# Altium PCB PCB0008.PcbDoc (part 2 of 2)
Units mil, origin at the board's own origin, x right, y up, seen from the top; angles counter-clockwise.
Board outline 5500 x 5500 mil, 4 copper layers (Top Layer, Ground, Power, Bottom Layer); 231 components, 118 nets, 798 pads, 388 vias.
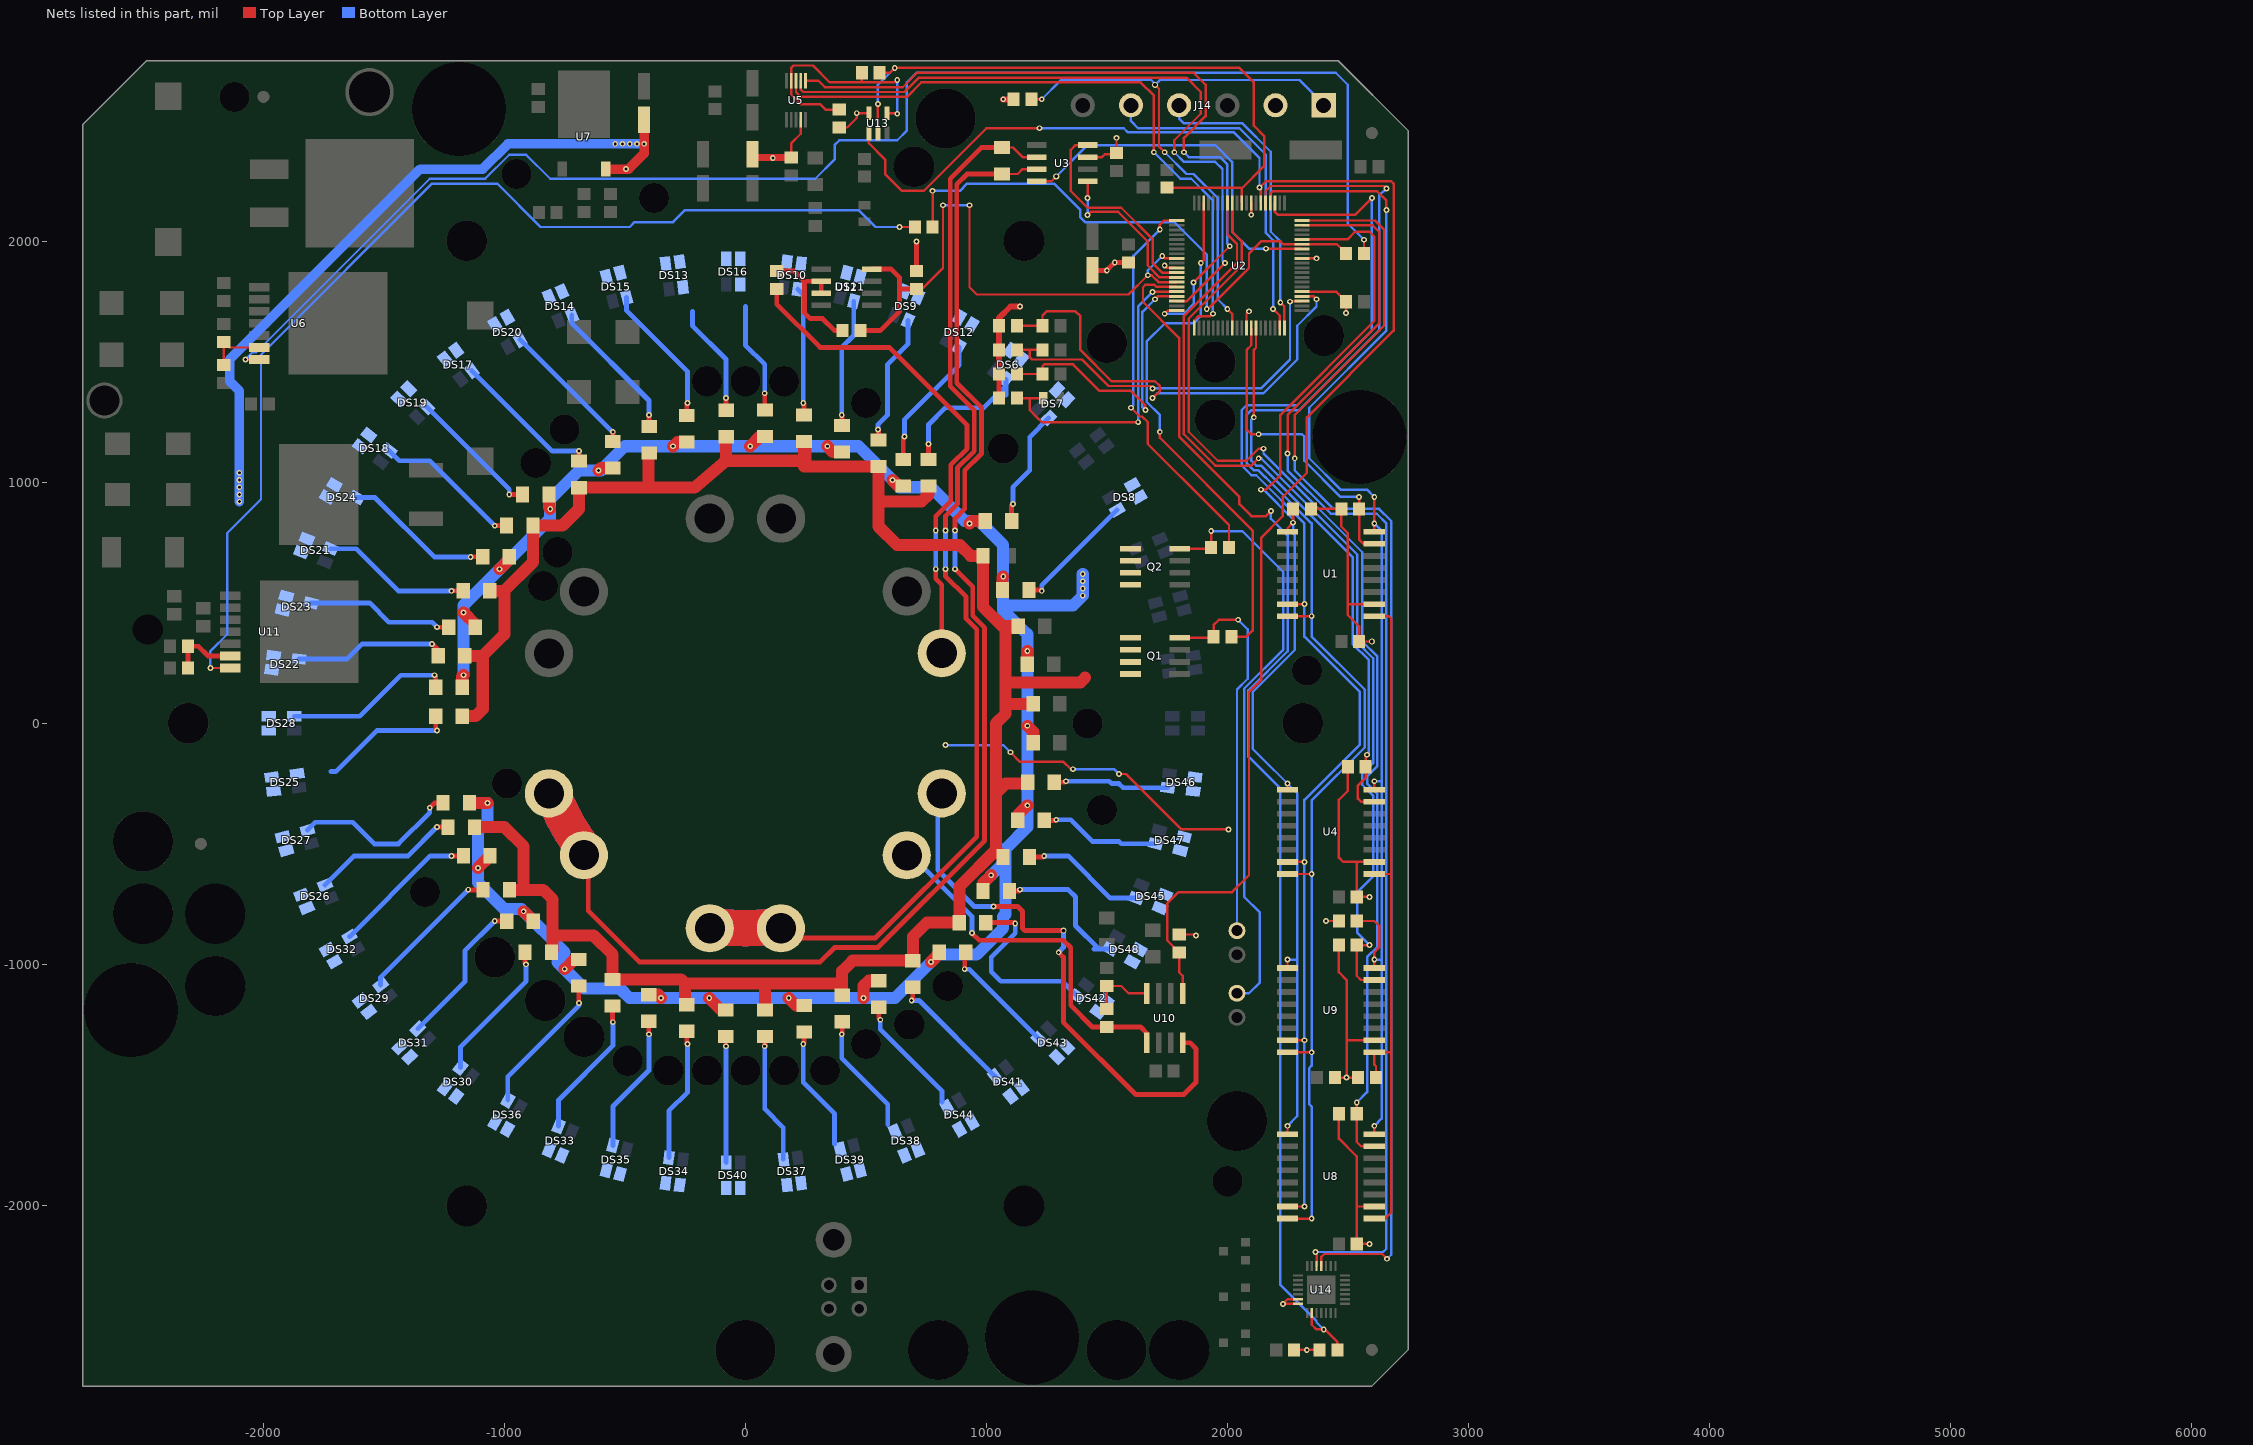
[diagram p4: the nets of this part, all layers, seen from the top]

## Via types
v1: diameter 24, hole 12, Top Layer to Bottom Layer, tented both sides, 316 vias
v2: diameter 25, hole 15, Top Layer to Bottom Layer, tented both sides, 67 vias
v3: diameter 40, hole 24, Top Layer to Bottom Layer, tented both sides, 5 vias

## Nets (pads, with @x,y where several pads share a name; then routed paths per layer and width w, separated by ;. In a path a pad name is that pad's centre, name@x,y a point inside that pad or via, vN(x,y) a via of type N, cw(c..) or ccw(c..) an arc to the next point about the centre after c; other vN are vias at no path point) (continued)
NetDS6_1: DS6.1 DS6.3 DS6.4 R49.2 | length 600
  Top Layer w20: R49.2@760,1095 v1(760,1160)
  Bottom Layer w20: v1(760,1160) 760,1240 830,1310 990,1310 DS6.3@1082.07,1402.07 ; 1082.07,1362.07 DS6.3@1082.07,1427.86
NetDS7_1: DS7.1 DS7.3 DS7.4 R60.2 | length 491.4
  Top Layer w20: R60.2@1105,840 1105,905 v1(1110,910)
  Bottom Layer w20: v1(1110,910) 1110,980 1180,1050 1180,1188.24 DS7.3@1259.3,1267.54
NetDS8_1: DS8.1 DS8.3 DS8.4 R61.2 | length 519.4
  Top Layer w20: R61.2@1177.42,553.51 1226.49,553.51 v1(1230,550)
  Bottom Layer w20: v1(1230,550) 1230,573.12 DS8.3@1542.73,885.85
NetDS9_1: DS9.1 DS9.3 DS9.4 R50.2 | length 548.8
  Top Layer w20: v1(550,1220) 552.66,1217.34 R50.2@552.66,1175.69
  Bottom Layer w20: v1(550,1220) 550,1240 590,1280 590,1490 674.94,1574.94 DS9.3@674.94,1671.6
NetDS10_1: DS10.1 DS10.3 DS10.4 R51.2 | length 534
  Top Layer w20: v1(240,1330) 243.53,1326.47 R51.2@243.53,1279.3
  Bottom Layer w20: DS10.3@217.34,1802.45 240,1779.79 v1(240,1330)
NetDS11_1: DS11.1 DS11.3 DS11.4 R62.2 | length 536.6
  Top Layer w20: v1(400,1280) 401.06,1278.94 R62.2@401.06,1236.48
  Bottom Layer w20: v1(400,1280) 400,1560 449.77,1609.77 DS11.3@449.77,1752.02
NetDS12_1: DS12.1 DS12.3 DS12.4 R63.2 | length 564.5
  Top Layer w20: R63.2@654.82,1094.88 654.82,1184.82 v1(660,1190)
  Bottom Layer w20: v1(660,1190) 660,1260 887,1487 DS12.3@887,1563.21
NetDS13_1: DS13.1 DS13.3 DS13.4 R52.2 | length 468
  Top Layer w20: R52.2@-80,1300 v1(-80,1350)
  Bottom Layer w20: -220,1710 -220,1650 -80,1510 v1(-80,1350)
NetDS14_1: DS14.1 DS14.3 DS14.4 R53.2 | length 594.7
  Top Layer w20: v1(-400,1280) -399.65,1279.65 R53.2@-399.65,1232.34
  Bottom Layer w20: DS14.3@-720.38,1694.2 -720.38,1660.38 -400,1340 v1(-400,1280)
NetDS15_1: DS15.1 DS15.3 DS15.4 R64.2 | length 595.9
  Top Layer w20: R64.2@-243.14,1277.36 -243.14,1326.86 v1(-240,1330)
  Bottom Layer w20: DS15.3@-492.72,1767.3 -492.72,1712.72 -240,1460 v1(-240,1330)
NetDS16_1: DS16.1 DS16.3 DS16.4 R65.2 | length 461.1
  Top Layer w20: R65.2@80,1302.08 v1(80,1370)
  Bottom Layer w20: 0,1730 0,1570 80,1490 v1(80,1370)
NetDS17_1: DS17.1 DS17.3 DS17.4 R54.2 | length 625.3
  Top Layer w20: R54.2@-690.49,1088.39 -690.49,1129.51 v1(-690,1130)
  Bottom Layer w20: DS17.3@-1135.22,1463.81 -801.41,1130 v1(-690,1130)
NetDS18_1: DS18.1 DS18.3 DS18.4 R55.2 | length 616.4
  Top Layer w20: v1(-1040,820) -1038.98,821.02 R55.2@-991.19,821.02
  Bottom Layer w20: DS18.3@-1477.86,1132.07 -1435.79,1090 -1310,1090 v1(-1040,820)
NetDS19_1: DS19.1 DS19.3 DS19.4 R66.2 | length 559.8
  Top Layer w20: v1(-980,950) R66.2@-925,950
  Bottom Layer w20: DS19.3@-1321.54,1313.3 -980,971.76 v1(-980,950)
NetDS20_1: DS20.1 DS20.3 DS20.4 R67.2 | length 583.2
  Top Layer w20: v1(-550,1210) -549.94,1209.94 R67.2@-549.94,1170.17
  Bottom Layer w20: DS20.3@-934.85,1592.73 -552.12,1210 v1(-550,1210)
NetDS21_1: DS21.1 DS21.3 DS21.4 R56.2 | length 623.3
  Top Layer w20: v1(-1220,550) -1219.74,550.26 R56.2@-1170.83,550.26
  Bottom Layer w20: DS21.3@-1721.6,724.94 -1614.94,724.94 -1440,550 v1(-1220,550)
NetDS22_1: DS22.1 DS22.3 DS22.4 R57.2 | length 638.8
  Top Layer w20: v1(-1300,330) -1275,305 R57.2@-1275,280
  Bottom Layer w20: DS22.3@-1852.45,267.34 -1652.66,267.34 -1590,330 v1(-1300,330)
NetDS23_1: DS23.1 DS23.3 DS23.4 R68.2 | length 612.5
  Top Layer w20: v1(-1279.24,399.24) R68.2@-1231.14,399.24
  Bottom Layer w20: DS23.3@-1802.02,499.77 -1559.77,499.77 -1480,420 -1300,420 v1(-1279.24,399.24)
NetDS24_1: DS24.1 DS24.3 DS24.4 R69.2 | length 626.5
  Top Layer w20: v1(-1140,690) -1138.7,691.3 R69.2@-1089.61,691.3
  Bottom Layer w20: DS24.3@-1613.21,937 -1537,937 -1290,690 v1(-1140,690)
NetDS25_1: DS25.1 DS25.3 DS25.4 R88.2 | length 572.5
  Top Layer w20: R88.2@-1285,30 -1285,-25 v1(-1280,-30)
  Bottom Layer w20: -1720,-200 -1700,-200 -1530,-30 v1(-1280,-30)
NetDS26_1: DS26.1 DS26.3 DS26.4 R89.2 | length 609.5
  Top Layer w20: v1(-1280,-430) -1279.63,-430.37 R89.2@-1234.45,-430.37
  Bottom Layer w20: DS26.3@-1744.2,-670.38 -1623.82,-550 -1400,-550 v1(-1280,-430)
NetDS27_1: DS27.1 DS27.3 DS27.4 R100.2 | length 695.3
  Top Layer w20: v1(-1310,-350) -1290,-330 R100.2@-1255,-330
  Bottom Layer w20: DS27.3@-1817.3,-442.72 -1784.58,-410 -1630,-410 -1540,-500 -1440,-500 -1310,-370 v1(-1310,-350)
NetDS28_1: DS28.1 DS28.3 DS28.4 R101.2 | length 704.5
  Top Layer w20: v1(-1290,200) -1285,195 R101.2@-1285,150
  Bottom Layer w20: DS28.3@-1871.85,29.53 -1600.47,29.53 -1430,200 v1(-1290,200)
NetDS29_1: DS29.1 DS29.3 DS29.4 R90.2 | length 607.3
  Top Layer w20: v1(-1150,-690) -1149.12,-690.88 R90.2@-1088.98,-690.88
  Bottom Layer w20: DS29.3@-1513.81,-1085.22 -1513.81,-1053.81 v1(-1150,-690)
NetDS30_1: DS30.1 DS30.3 DS30.4 R91.2 | length 592.6
  Top Layer w20: R91.2@-915,-950 -915,-995 v1(-910,-1000)
  Bottom Layer w20: DS30.3@-1182.07,-1427.86 -1182.07,-1342.07 -910,-1070 v1(-910,-1000)
NetDS31_1: DS31.1 DS31.3 DS31.4 R102.2 | length 629.3
  Top Layer w20: v1(-1040,-820) -1039.34,-820.66 R102.2@-990.78,-820.66
  Bottom Layer w20: DS31.3@-1359.3,-1267.54 -1163.87,-1072.11 -1163.87,-943.87 v1(-1040,-820)
NetDS32_1: DS32.1 DS32.3 DS32.4 R103.2 | length 611.5
  Top Layer w20: v1(-1220,-550) -1219.86,-549.86 R103.2@-1170,-549.86
  Bottom Layer w20: DS32.3@-1642.73,-884.85 -1307.88,-550 v1(-1220,-550)
NetDS33_1: DS33.1 DS33.3 DS33.4 R92.2 | length 592.4
  Top Layer w20: R92.2@-551.29,-1172.9 -551.29,-1238.71 v1(-550,-1240)
  Bottom Layer w20: DS33.3@-774.94,-1671.6 -774.94,-1562.96 -550,-1338.02 v1(-550,-1240)
NetDS34_1: DS34.1 DS34.3 DS34.4 R93.2 | length 558.1
  Top Layer w20: R93.2@-243.22,-1277.75 -243.22,-1326.78 v1(-240,-1330)
  Bottom Layer w20: DS34.3@-317.34,-1802.45 -317.34,-1607.34 -240,-1530 v1(-240,-1330)
NetDS35_1: DS35.1 DS35.3 DS35.4 R104.2 | length 578.6
  Top Layer w20: R104.2@-400.81,-1235.74 -400.81,-1289.19 v1(-400,-1290)
  Bottom Layer w20: DS35.3@-549.77,-1752.02 -549.77,-1589.77 -400,-1440 v1(-400,-1290)
NetDS36_1: DS36.1 DS36.3 DS36.4 R105.2 | length 596.5
  Top Layer w20: R105.2@-691.55,-1089.98 -691.55,-1158.45 v1(-690,-1160)
  Bottom Layer w20: DS36.3@-986,-1563.21 -986,-1466 -690,-1170 v1(-690,-1160)
NetDS37_1: DS37.1 DS37.3 DS37.4 R94.2 | length 542.6
  Top Layer w20: v1(80,-1340) 81.53,-1338.47 R94.2@81.53,-1298.9
  Bottom Layer w20: v1(80,-1340) 80,-1600 157.41,-1677.41 DS37.3@157.41,-1808.79
NetDS38_1: DS38.1 DS38.3 DS38.4 R95.2 | length 505.8
  Top Layer w20: v1(400,-1290) 401.68,-1288.32 R95.2@401.68,-1238.31
  Bottom Layer w20: v1(400,-1290) 400,-1390 590.61,-1580.61 590.61,-1664.43
NetDS39_1: DS39.1 DS39.3 DS39.4 R106.2 | length 519.5
  Top Layer w20: v1(240,-1330) 243.89,-1326.11 R106.2@243.89,-1281.09
  Bottom Layer w20: v1(240,-1330) 240,-1490 370.36,-1620.36 DS39.3@370.36,-1744.94
NetDS40_1: DS40.1 DS40.3 DS40.4 R107.2 | length 522.9
  Top Layer w20: R107.2@-81.59,-1299.84 -81.59,-1338.41 v1(-80,-1340)
  Bottom Layer w20: v1(-80,-1340) -80,-1821.38 DS40.3@-79.53,-1821.85
NetDS41_1: DS41.1 DS41.3 DS41.4 R96.2 | length 532.4
  Top Layer w20: v1(690,-1150) 694.76,-1145.24 R96.2@694.76,-1094.78
  Bottom Layer w20: v1(690,-1150) 721.41,-1150 DS41.3@1035.22,-1463.81
NetDS42_1: DS42.1 DS42.3 DS42.4 R97.2 | length 760.6
  Top Layer w20: R97.2@997.65,-826.68 v1@1116.68,-826.68
  Bottom Layer w20: v1(1120,-830) 1120,-870 1020,-970 1020,-1030 1060,-1070 1315.79,-1070 DS42.3@1377.86,-1132.07
NetDS43_1: DS43.1 DS43.3 DS43.4 R108.2 | length 492.4
  Top Layer w20: v1(910,-1020) R108.2@910,-955
  Bottom Layer w20: v1(910,-1020) 928.24,-1020 DS43.3@1217.54,-1309.3
NetDS44_1: DS44.1 DS44.3 DS44.4 R109.2 | length 503.2
  Top Layer w20: R109.2@553.58,-1177.54 553.58,-1223.58 v1(560,-1230)
  Bottom Layer w20: v1(560,-1230) 560,-1270 815.43,-1525.43 DS44.3@815.43,-1572.31
NetDS45_1: DS45.1 DS45.3 DS45.4 R98.2 | length 516.7
  Top Layer w20: R98.2@1179.23,-554.41 1235.59,-554.41 v1(1240,-550)
  Bottom Layer w20: v1(1240,-550) 1340,-550 1514.94,-724.94 DS45.3@1621.6,-724.94
NetDS46_1: DS46.1 DS46.3 DS46.4 R99.2 | length 484
  Top Layer w20: R99.2@1281.39,-243.94 1326.06,-243.94 v1(1330,-240)
  Bottom Layer w20: v1(1330,-240) 1510,-240 1520,-250 1550,-250 1567.34,-267.34 DS46.3@1752.45,-267.34
NetDS47_1: DS47.1 DS47.3 DS47.4 R110.2 | length 503.8
  Top Layer w20: R110.2@1240.61,-402.46 1287.54,-402.46 v1(1290,-400)
  Bottom Layer w20: v1(1290,-400) 1350,-400 1440,-490 1550,-490 1559.77,-499.77 DS47.3@1702.02,-499.77
NetDS48_1: DS48.1 DS48.3 DS48.4 R111.2 | length 658.7
  Top Layer w20: R111.2@1096.27,-695.75 1134.25,-695.75 v1(1140,-690)
  Bottom Layer w20: v1(1140,-690) 1200,-690 1340,-690 1370,-720 1370,-840 1466,-936 DS48.3@1513.21,-936 1446,-936
NetDS49_1: DS49.1 Q1.4 R28.2 | length 1620
  Top Layer w10: Q1.4@1802.36,355 R28.2@1938,355 ; R28.2@1943,360 1943,408 1965,430 v1(2045,430)
  Bottom Layer w10: DS49.1@2040,-860 2040,105 2040,140 2085,185 2085,390 v1(2045,430)
NetDS50_1: DS50.1 Q2.4 R40.2 | length 2474.1
  Top Layer w10: Q2.4@1802.36,725 R40.2@1928,725 ; R40.2@1933,730 v1(1933,798)
  Bottom Layer w10: v1(1933,798) 2062,798 2232.5,627.5 2232.5,306.88 2070,144.38 2070,-720 2135,-785 2135,-1075 2090,-1120 DS50.1@2040,-1120
NetJ3_1: J3.1 J7.1 R5.2 U3.7 | length 6014.2
  Top Layer w10: R5.2@1065,2280 1130,2280 1150,2300 U3.7@1209.68,2300
  Top Layer w20: J3.1@-651.82,-546.94 -651.82,-778.18 -440,-990 310,-990 370,-930 550,-930 992.9,-487.1 992.9,397.1 943.21,446.79 943.21,566.79 v1(870,640) ; v1(870,800) 870,850 910,890 910,1050 980,1120 980,1310 877.5,1412.5 877.5,2237.5 920,2280 R5.2@1065,2280
  Top Layer w150: J7.1@-798.37,-290.58 ccw(c0,0) J3.1@-650.84,-546.12
  Bottom Layer w20: J7.1@-817.79,-310 J7.1@-798.37,-290.58 ; v1(870,640) v1(870,800)
  Bottom Layer w150: J7.1@-798.37,-290.58 ccw(c0,0) J3.1@-650.84,-546.12
NetJ4_1: J4.1 J8.1 R5.1 U3.6 | length 5203.5
  Top Layer w10: R5.1@1065,2390 1110,2390 1150,2350 U3.6@1209.68,2350
  Top Layer w20: J4.1@147.59,-837.05 200.55,-890 540,-890 960,-470 960,390 915.71,434.29 915.71,525.4 830,611.11 v1(830,640) ; v1(830,800) 830,860 880,910 880,1060 950,1130 950,1300 850,1400 850,2260 980,2390 R5.1@1065,2390
  Top Layer w150: J8.1@-147.59,-837.05 ccw(c0,0) J4.1@147.59,-837.05
  Bottom Layer w20: v1(830,640) v1(830,800)
  Bottom Layer w150: J8.1@-147.59,-837.05 ccw(c0,0) -147.13,-837.13 ccw(c0,0) 147.59,-837.05 cw(c0,0) J8.1@-147.59,-837.05
NetJ9_1: J9.1 R16.2 U10.5 | length 1539.7
  Top Layer w20: v1(940,-870) 970,-900 1320,-900 1350,-930 1350,-1170 1440,-1260 1640,-1260 1665,-1285 U10.5@1665,-1325.36
  Bottom Layer w20: J9.1@652.64,-547.63 687.63,-547.63 940,-800 v1(940,-870)
NetJ10_1: J10.1 U10.8 | length 2281.4
  Top Layer w20: v1(1030,-760) 1130,-760 1150,-780 1150,-850 1160,-860 v2(1320,-860) ; v1(1300,-950) 1320,-970 1320,-1240 1620,-1540 1820,-1540 1870,-1490 1870,-1350 1845.36,-1325.36 U10.8@1815,-1325.36
  Bottom Layer w20: J10.1@798.35,-290.58 798.35,-608.35 950,-760 v1(1030,-760) ; v1(1300,-950) 1320,-930 v2(1320,-860)
NetJ11_1: J11.1 R128.1 | length 2155.4
  Top Layer w10: J11.1@830,261.71 800.39,291.32 J11.1@830,320.93
  Top Layer w20: R128.1@130,1803 130,1740 310,1560 597.78,1560 920,1237.78 920,1140 852.5,1072.5 852.5,922.5 790,860 v1(790,800) ; v1(790,640) 790,600 815,575 J11.1@815,291.32
  Bottom Layer w20: v1(790,640) v1(790,800)
NetJ14_1: J14.1 R4.1 U2.9 | length 2459.3
  Top Layer w10: R4.1@1187,2590 v1(1230,2590) ; v2(1700,2650) 1716.33,2633.67 1716.33,2393.67 v1(1740,2370) ; v1(2000,1720) 2020.47,1699.53 U2.9@2020.47,1640.16
  Bottom Layer w10: v1(1230,2590) 1310,2670 1684.12,2670 v2@1702.06,2652.06 ; v2(1700,2650) 1720,2670 2300,2670 2385,2585 J14.1@2400,2585 ; v1(1740,2370) 1830,2280 1860,2280 1960,2180 1960,1760 v1(2000,1720)
NetJ14_4: J14.4 U2.20 | length 1267.9
  Top Layer w10: v1(2220,1747.01) 2237.01,1730 U2.20@2237.01,1640.16
  Bottom Layer w10: J14.4@1800,2585 1800,2510 1820,2490 2062.5,2490 2180,2372.5 2180,2040 2220,2000 v1(2220,1747.01)
NetJ14_5: J14.5 U2.19 | length 1446.6
  Top Layer w10: v1(2190,1720) 2217.32,1692.68 U2.19@2217.32,1640.16
  Bottom Layer w10: J14.5@1600,2585 1600,2500 1630,2470 2050,2470 2160,2360 2160,2035.25 2190,2005.25 v1(2190,1720)
NetJP1_1: JP1.1 R19.1 U2.24 | length 1930.4
  Top Layer w10: R19.1@1127,1650 JP1.1@1233,1650 1233,1693 1250,1710 1370,1710 1390,1690 1390,1550 1520,1420 1700,1420 1720,1400 1720,1380 v1(1690,1350) ; U2.24@2309.84,1772.05 2357.95,1772.05 v1(2370,1760)
  Bottom Layer w10: v1(1690,1350) 1710,1370 2150,1370 2290,1510 2290,1650 2370,1730 v1(2370,1760)
NetJP2_1: JP2.1 R23.1 U2.23 | length 1610.4
  Top Layer w10: R23.1@1127,1550 JP2.1@1233,1550 ; 1180,1550 1180,1520 1190,1510 1397.5,1510 1507.5,1400 1680,1400 v1(1690,1390) ; v1(2260,1750) 2262.36,1752.36 U2.23@2309.84,1752.36
  Bottom Layer w10: v1(1690,1390) 2140,1390 2260,1510 v1(2260,1750)
NetJP3_1: JP3.1 R26.1 U2.77 | length 1241.4
  Top Layer w10: R26.1@1127,1450 JP3.1@1233,1450 1233,1483 1240,1490 1360,1490 1470,1380 1600,1380 1660,1320 v1(1660,1300) ; v1(1700,1760) 1712.05,1772.05 U2.77@1790.16,1772.05
  Bottom Layer w10: v1(1660,1300) 1647.5,1312.5 1647.5,1707.5 v1(1700,1760)
NetJP4_1: JP4.1 R27.1 U2.76 | length 1292.4
  Top Layer w10: R27.1@1127,1350 JP4.1@1233,1350 ; 1180,1350 1180,1300 1210,1270 1230,1250 v1(1630,1250) ; v1(1690,1790) 1691.73,1791.73 U2.76@1790.16,1791.73
  Bottom Layer w10: v1(1630,1250) 1630,1730 v1(1690,1790)
NetQ1_5: Q1.5 Q1.6 Q1.7 Q1.8 R46.1 R47.1 R48.1 R49.1 R50.1 R51.1 R52.1 R53.1 R54.1 R55.1 R56.1 R57.1 R88.1 R89.1 R90.1 R91.1 R92.1 R93.1 R94.1 R95.1 R96.1 R97.1 R98.1 R99.1 | length 9552.4
  Top Layer w50: R88.1@-1175,30 -1120,30 -1090,60 -1090,280 ; R57.1@-1165,280 -1090,280 ; R89.1@-1124.45,-430.37 -999.63,-430.37 -920,-510 -920,-690.88 ; R56.1@-1060.56,550 -1000,550 ; R90.1@-978.98,-690.88 -839.12,-690.88 -800,-730 -800,-945 R91.1@-805,-950 ; -800,-880 -630,-880 -551.29,-958.71 R92.1@-551.29,-1062.9 -267.1,-1062.9 -250,-1080 ; -401.61,978.39 R53.1@-401.61,1120.38 ; R93.1@-243.22,-1167.75 -250,-1160.97 -250,-1080 ; R52.1@-80,1190 -80,1090 ; R94.1@81.53,-1188.9 81.53,-1081.53 ; R51.1@243.53,1169.3 250,1162.82 250,1090 -80,1090 ; R51.1@244.31,1168.51 244.31,1065.69 R50.1@552.66,1065.69 552.66,817.34 630,740 890,740 934.62,695.38 R48.1@985.71,695.38 985.71,484.29 1065.71,404.29 R47.1@1130.82,404.29 ; R95.1@401.68,-1128.31 401.68,-1028.32 445.22,-984.78 R96.1@694.76,-984.78 694.76,-885.24 753.32,-826.68 R97.1@887.65,-826.68 887.65,-677.53 1040,-525.18 ; 401.68,-1080 391.68,-1090 381.68,-1080 -250,-1080 ; 552.66,920 730,920 760,950 R49.1@760,985 ; 1040,-290 1080,-250 1165.33,-250 R99.1@1171.39,-243.94 ; R98.1@1069.23,-554.41 1040,-525.18 ; 1080,80 1192.77,80 R46.1@1194.68,81.91 ; 1080,170 1390,170 1410,190 ; 1080,404.29 1080,40 1040,0 1040,-525.18 ; -1090,280 -1000,370 -1000,550 ; -1000,550 -881.19,668.81 R55.1@-881.19,821.02 -758.98,821.02 -690.49,889.51 R54.1@-690.49,978.39 -211.61,978.39 -80,1090
NetQ2_5: Q2.5 Q2.6 Q2.7 Q2.8 R58.1 R59.1 R60.1 R61.1 R62.1 R63.1 R64.1 R65.1 R66.1 R67.1 R68.1 R69.1 R100.1 R101.1 R102.1 R103.1 R104.1 R105.1 R106.1 R107.1 R108.1 R109.1 R110.1 R111.1 | length 9819.7
  Top Layer w50: R101.1@-1175,150 -1175,195 v1(-1170,200) ; v1(-1170,460) -1121.14,411.14 R68.1@-1121.14,399.24 ; R100.1@-1145,-330 v1(-1070,-330) ; v1(-1110,-600) -1060,-550 R103.1@-1060,-549.86 ; v1(-1020,640) -979.61,680.39 R69.1@-979.61,691.3 ; v1(-920,-780) -880.78,-819.22 R102.1@-880.78,-820.66 ; R66.1@-815,950 -815,895 v1(-810,890) ; v1(-750,-1020) -709.98,-979.98 R105.1@-691.55,-979.98 ; v1(-610,1050) -599.83,1060.17 R67.1@-549.94,1060.17 ; R104.1@-400.81,-1125.74 -360,-1125.74 -360,-1130 v1(-350,-1140) ; v1(-300,1150) -282.64,1167.36 R64.1@-243.14,1167.36 ; v1(-150,-1140) -100.16,-1189.84 R107.1@-81.59,-1189.84 ; v1(20,1150) 60.45,1190.45 R65.1@81.63,1190.45 ; v1(180,-1140) 211.09,-1171.09 R106.1@243.89,-1171.09 ; v1(340,1150) 363.52,1126.48 R62.1@401.06,1126.48 ; v1(490,-1140) 490,-1090 512.46,-1067.54 R109.1@553.58,-1067.54 ; v1(610.16,1009.84) 635.12,984.88 R63.1@654.82,984.88 ; v1(770,-990) 805,-955 R108.1@805,-950 ; v1(930,830) 940,840 R60.1@995,840 ; R111.1@986.27,-695.75 986.27,-663.73 v1(1020,-630) ; R61.1@1067.42,553.51 1067.42,607.42 v1(1070,610) ; R110.1@1130.61,-402.46 1130.61,-379.39 v1(1170,-340) ; v1(1170,-10) 1195,-35 R59.1@1195,-80 ; R58.1@1170,245 v1(1170,300)
  Bottom Layer w50: v1(-1170,200) -1170,490 -810,850 -810,930 -690,1050 -600,1050 -500,1150 470,1150 640,980 770,980 910,840 970,840 1070,740 1070,470 1170,370 1170,-430 1080,-520 1080,-570 ; v1(-1070,-330) -1070,-410 -1110,-450 -1110,-660 -1000,-770 -930,-770 -750,-950 -780,-990 -670,-1100 -520,-1100 -480,-1140 620,-1140 800,-960 890,-960 960,-960 1070,-850 1070,-802.5 1080,-792.5 1080,-570 ; v1(1020,-630) 1080,-570 ; 1070,490 1360,490 v1(1400,530) v1(1400,560) v1(1400,590) v1(1400,620)
NetR1_2: R1.2 U1.9 U2.36 U4.9 U8.9 U9.9 | length 4686.4
  Top Layer w10: v1(2140,970) 2160,970 2220,1030 2220,1280 2610,1670 2610,2020 2590,2040 2530,2040 2498.27,2008.27 U2.36@2309.84,2008.27 ; U8.9@2249.88,-1705 v1(2249.88,-1670.12) ; U9.9@2249.88,-1015 v1(2249.88,-980.12) ; U4.9@2249.88,-275 v1@2249.88,-250.12 ; U1.9@2249.88,795 2249.88,809.88 v1(2273,833) R1.2@2273,890
  Bottom Layer w10: v1(2140,970) 2150,970 2273,847 2273,787 2280,780 2280,304.38 2105.59,129.96 2105.59,-105.59 2290,-290 2290,-1630 v1(2249.88,-1670.12) ; v1(2249.88,-980.12) 2289.88,-980.12
  other v1: 2250,-250
NetR2_2: R2.2 U1.1 U4.1 U8.1 U9.1 | length 2856.9
  Top Layer w10: U8.1@2610.12,-2055 2655,-2055 2680,-2030 2680,435 2670,445 U1.1@2610.12,445 ; U4.1@2610.12,-625 2675,-625 ; R2.2@2617,-1470 2617,-1423 2610.12,-1416.12 U9.1@2610.12,-1365 2675,-1365
NetR3_1: R3.1 U1.7 U2.13 | length 1317.2
  Top Layer w10: U2.13@2099.21,1640.16 2099.21,1569.21 2080,1550 2080,1220 2100,1200 v1(2130,1200) ; v1(2547,940) 2547,763 2565,745 U1.7@2610.12,745
  Bottom Layer w10: v1(2130,1200) 2310,1200 2320,1190 2320,1090 2470,940 v1(2547,940)
NetR6_1: R6.1 U2.14 U4.7 | length 2258.1
  Top Layer w10: v1(2110,1270) 2110,1550 2118.9,1558.9 U2.14@2118.9,1640.16 ; v1(2580,-130) 2574,-136 2574,-226 2542,-258 2542,-312 2555,-325 U4.7@2605.32,-325
  Bottom Layer w10: v1(2110,1270) 2100,1260 2100,1090 2120,1070 2140,1070 2520,690 2520,330 2587.5,262.5 v1@2587.5,-130
NetR7_2: R7.2 R9.1 U6.6 | length 252.5
  Top Layer w10: R9.1@-2165,1487 R7.2@-2165,1583 -2142,1560 U6.6@-2018,1560
NetR8_1: R8.1 R29.1 U2.50 U13.2 | length 2754.7
  Top Layer w10: U13.2@550,2447.68 v1(550,2570) ; R29.1@557,2700 600,2700 v1(620,2720) 2050,2720 2110,2660 2110,2480 2152.5,2437.5 2152.5,2312.5 2059.84,2219.84 ; R8.1@1750,2223 2056.68,2223 2059.84,2219.84 ; U2.50@2059.84,2159.84 2059.84,2219.84
  Bottom Layer w10: v1(550,2570) 550,2650 v1(620,2720)
NetR10_1: R10.1 U2.52 U8.7 | length 4661.7
  Top Layer w10: U2.52@2020.47,2159.84 2020.47,2039.53 2060,2000 2060,1900 1840,1680 1840,1210 1960,1090 2080,1090 2130,1140 v1(2150,1140) ; v1(2537,-1573) 2537,-1737 2555,-1755 U8.7@2610.12,-1755
  Bottom Layer w10: v1(2150,1140) 2150,1120 2560,710 2560,340 2622.5,277.5 2622.5,-177.5 2580,-220 2580,-250 2622.5,-292.5 2622.5,-927.5 2580,-970 2580,-1530 v1(2537,-1573)
NetR13_2: R13.2 R16.1 U10.4 | length 273.7
  Top Layer w10: R16.1@1500,-1186 R13.2@1500,-1090 1560,-1090 1590.64,-1120.64 U10.4@1665,-1120.64
NetR14_1: R14.1 U2.53 U9.7 | length 4025.7
  Top Layer w10: U2.53@2000.79,2159.84 2000.79,2029.21 2040,1990 2040,1910 1820,1690 1820,1200 1950,1070 2100,1070 v1(2130,1100) ; R14.1@2547,-910 R14.1@2537,-920 ; v1(2590,-920) R14.1@2537,-920 ; U9.7@2610.12,-1065 2555,-1065 2537,-1047 R14.1@2537,-920
  Bottom Layer w10: v1(2130,1100) 2140,1100 2540,700 2540,335.25 2605,270.25 2605,-165 2560,-210 2560,-254.75 2605,-299.75 2605,-635 2540,-700 2540,-870 v1(2590,-920)
NetR15_1: R15.1 U2.46 U10.1 U13.1 | length 6609.2
  Top Layer w10: U13.1@512.6,2447.68 512.6,2407.4 580,2340 580,2280 650,2210 740,2210 1000,2470 v1(1220,2470) ; U10.1@1815,-1120.64 1815,-1048 1800,-1033 R15.1@1800,-950 1750,-900 1750,-748 1798,-700 2020,-700 2090,-630 2090,130 2140,180 2140,770 2230,860 2230,940 2330,1040 2330,1270 2690,1630 2690,2240 2680,2250 2160,2250 v1(2133.58,2223.58) ; U2.46@2138.58,2159.84 2138.58,2218.58 v1(2133.58,2223.58) ; v1@2138.58,2223.58 v1(2133.58,2223.58)
  Bottom Layer w10: v1(1220,2470) 1570,2470 1587.5,2452.5 2027.5,2452.5 2133.58,2346.42 v1(2133.58,2223.58)
NetR17_2: R17.2 R18.1 U11.6 | length 281.6
  Top Layer w20: R18.1@-2313,230 R17.2@-2313,320 -2270,320 -2230,280 U11.6@-2138,280
NetR20_1: R20.1 R130.1 U2.35 | length 2415.2
  Top Layer w10: R20.1@777,2060 v1(777,2210) ; v1(1914.65,1720) 1920,1720 2090,1890 2090,1950 2140,2000 2220,2000 2231.42,1988.58 2454.42,1988.58 R130.1@2493,1950
  Bottom Layer w10: v1(777,2210) 890,2210 920,2240 1280,2240 1390,2130 1390,2100 1410,2080 1780,2080 1914.65,1945.35 v1(1914.65,1720)
NetR20_2: R20.2 U11.7 | length 4608.6
  Top Layer w10: v1(-2220,230) U11.7@-2138,230 ; v1(640,2060) R20.2@703,2060
  Bottom Layer w10: v1(-2220,230) -2220,300 -2150,370 -2150,790 -2010,930 -2010,1530 -1300,2240 -1030,2240 -850,2060 -480,2060 -460,2080 -300,2080 -250,2130 470,2130 540,2060 v1(640,2060)
NetR21_1: R21.1 U1.8 U2.44 U4.8 U8.8 U9.8 | length 5162.5
  Top Layer w10: U2.44@2177.95,2159.84 2177.95,2197.95 2187.95,2207.95 2622.05,2207.95 2660,2170 v1(2660,2130) ; R21.1@2537,-820 2610,-820 2630,-840 2630,-930 2610.12,-949.88 U9.8@2610.12,-1015 ; v1(2610,940) 2610.12,939.88 U1.8@2610.12,795 ; U8.8@2610.12,-1705 v1(2610.12,-1670.12) ; U4.8@2610.12,-275 v1(2610.12,-240.12)
  Bottom Layer w10: v1(2610,940) 2580,970 2470,970 2340,1100 2340,1310 2660,1630 v1(2660,2130) ; v1(2610.12,-1670.12) 2640,-1640.24 2640,800 v1(2610.12,829.88) ; v1(2610.12,-980.12) 2639.88,-980.12 ; v1(2610.12,-240.12) 2639.88,-240.12
NetR22_1: R22.1 R128.2 U12.2 U12.3 | length 571.1
  Top Layer w20: R128.2@130,1877 203,1877 245,1835 ; U12.3@314.69,1785 U12.2@314.69,1835 245,1835 ; R22.1@403,1630 370,1630 320,1680 270,1680 245,1705 245,1835
NetR22_2: R22.2 R129.1 U2.69 U2.74 U12.8 | length 2478.5
  Top Layer w10: R129.1@710,1803 733,1803 820,1890 v1(820,2150) ; v1(930,2150) 930,1810 960,1780 1590.4,1780 v1(1670,1859.6) 1685.65,1859.6 1714.15,1831.1 U2.74@1790.16,1831.1 ; v1(1730,1940) 1740.47,1929.53 U2.69@1790.16,1929.53
  Top Layer w20: R22.2@477,1630 560,1630 640,1710 640,1850 605,1885 U12.8@525.31,1885 ; 640,1803 R129.1@710,1803
  Bottom Layer w10: v1(820,2150) v1(930,2150) ; v1(1670,1859.6) 1670,1880 v1(1730,1940)
NetR28_1: R28.1 U2.58 | length 2224.1
  Top Layer w10: v1(1720,1210) 1720,1185.25 2105,800.25 2105,385 2080,360 R28.1@2017,360 ; v1(1890,1910) 1902.36,1922.36 U2.58@1902.36,2159.84
  Bottom Layer w10: v1(1720,1210) 1720,1280 1665,1335 1665,1585 1740,1660 1860,1660 1890,1690 v1(1890,1910)
NetR29_2: R29.2 R30.1 U5.4 U13.4 | length 1033.7
  Top Layer w10: R30.1@390,2547 333,2547 310,2570 230,2570 190.32,2609.68 U5.4@190.32,2666.71 190.32,2720.32 200,2730 280,2730 350,2660 620,2660 v1(630,2670) ; 483,2663 R29.2@483,2700 ; U13.4@587.4,2532.32 627.68,2532.32 v1(630,2530)
  Bottom Layer w10: v1(630,2530) v1(630,2670)
NetR40_1: R40.1 U2.61 | length 1641.4
  Top Layer w10: v1(1600,1310) 1636.33,1273.67 1646.33,1273.67 1670,1250 1670,1160 1940,890 2007,823 R40.1@2007,730 ; v1(1720,2050) 1720,2070 1737.01,2087.01 U2.61@1790.16,2087.01
  Bottom Layer w10: v1(1600,1310) 1610,1320 1610,1940 v1(1720,2050)
NetR112_1: R112.1 U2.75 U14.9 | length 5231.5
  Top Layer w10: U2.75@1790.16,1811.42 1706.08,1811.42 1697.5,1820 1660,1820 1650,1810 1650,1750 1800,1600 1800,1190 2050,940 2050,910 2100,860 2160,860 v1(2180.93,880.93) ; U14.9@2350.63,-2460.63 U14.9@2350.63,-2440.55 ; U14.9@2350.63,-2447.6 2350.63,-2495.63 2370,-2515 v1(2400,-2515) 2405,-2515 2457,-2567 R112.1@2457,-2600
  Bottom Layer w10: v1@2180,880 2180,850 2250,780 2250,299.38 2087.68,137.05 2087.68,-137.68 2220,-270 2220,-2330 2370,-2480 2370,-2485 v1(2400,-2515)
NetR130_2: R130.2 U6.7 | length 6108.5
  Top Layer w10: v1(-2075,1510) U6.7@-2018,1510 ; R130.2@2567,1950 v1(2567,2007)
  Bottom Layer w10: v1(-2075,1510) -2045,1540 -2030,1540 -1310,2260 -1080,2260 -980,2360 -910,2360 -810,2260 290,2260 370,2340 370,2400 390,2420 630,2420 670,2460 670,2660 710,2700 2450,2700 2500,2650 2500,2074 v1(2567,2007)
NetU1_15: U1.15 U2.43 U4.15 U8.15 U9.15 | length 5596.1
  Top Layer w10: U2.43@2197.64,2159.84 2197.64,2122.36 2210,2110 2530,2110 v1(2600,2180) ; U8.15@2249.88,-2005 v1(2320,-2005) ; U9.15@2249.88,-1315 v1(2320,-1315) ; U4.15@2249.88,-575 v1(2320,-575) ; U1.15@2249.88,495 v1(2320,495)
  Bottom Layer w10: v1(2320,-2005) 2320,-317.5 2550,-87.5 2550,130 2320,360 2320,830 2120,1030 2100,1030 2060,1070 2060,1300 2080,1320 2290,1320 2600,1630 v1(2600,2180)
NetU1_16: U1.16 U2.45 U4.16 U8.16 U9.16 | length 5910.8
  Top Layer w10: U2.45@2158.27,2159.84 2158.27,2208.27 2180,2230 2650,2230 v1(2660,2220) ; U8.16@2249.88,-2055 v1(2350,-2055) ; U9.16@2249.88,-1365 v1(2350,-1365) ; U4.16@2249.88,-625 v1(2350,-625) ; U1.16@2249.88,445 v1(2350,445)
  Bottom Layer w10: v1(2350,-2055) 2350,-1590 2340,-1580 2340,-1430 2350,-1420 2350,-320 2570,-100 2570,140 2350,360 2350,830 2159.35,1020.65 2158.7,1020 2128.7,1050 2110,1050 2080,1080 2080,1280 2100,1300 2300,1300 2630,1630 2630,2190 v1(2660,2220)
NetU2_1: U2.1 U5.3 | length 2741.5
  Top Layer w10: U5.3@210,2666.71 210,2620 230,2600 670,2600 730,2660 1640,2660 1695,2605 v1(1695,2370) ; U2.1@1862.99,1640.16 1862.99,1672.99 1880,1690 1930,1690 v1(1940,1700)
  Bottom Layer w10: v1(1695,2370) 1805,2260 1850,2260 1940,2170 v1(1940,1700)
NetU2_34: U2.34 U3.8 | length 1510.3
  Top Layer w10: U3.8@1209.68,2250 1270,2250 v2(1290,2270) ; v1(2160,1970) U2.34@2309.84,1968.9
  Bottom Layer w10: v2(1290,2270) 1420,2400 1950,2400 2020,2330 2020,2040 2090,1970 v1(2160,1970)
NetU2_39: U2.39 U14.26 | length 5349.7
  Top Layer w10: v1(2250,1120) 2250,1280 2630,1660 2630,2040 2602.68,2067.32 U2.39@2309.84,2067.32 ; v1(2366.38,-2193.62) 2370.31,-2197.56 U14.26@2370.31,-2252.4
  Bottom Layer w10: v1(2250,1120) 2250,1050 2430,870 2620,870 2660,830 2660,-2180 2646.38,-2193.62 v1(2366.38,-2193.62)
NetU2_40: U2.40 U14.25 | length 5389.6
  Top Layer w10: v1(2280,1100) 2280,1280 2650,1650 2650,2050 2612.99,2087.01 U2.40@2309.84,2087.01 ; U14.25@2390,-2252.4 2390,-2214 2402,-2202 2643,-2202 v1(2663,-2222)
  Bottom Layer w10: v1(2280,1100) 2280,1050 2440,890 2630,890 2680,840 2680,-2205 v1(2663,-2222) v1@2662.87,-2222.13
NetU2_72: U2.72 U3.4 | length 888
  Top Layer w10: U3.4@1420.31,2400 1370,2400 1350,2380 1350,2210 1420,2140 1560,2140 1690,2010 1690,1910 1729.53,1870.47 U2.72@1790.16,1870.47
NetU2_73: U2.73 U3.1 | length 686.8
  Top Layer w10: v1(1420,2110) 1432.5,2122.5 1547.5,2122.5 1670,2000 1670,1900 1719.21,1850.79 U2.73@1790.16,1850.79 ; v1@1420.31,2179.68 U3.1@1420.31,2250
  Bottom Layer w10: v1(1420,2110) v1(1420,2180)
NetU2_78: U2.78 U5.2 | length 2934.5
  Top Layer w10: U5.2@229.69,2666.71 229.69,2630.32 240,2620 660,2620 720,2680 1830,2680 1890,2620 1890,2530 1780,2420 v1(1780,2370) ; U2.78@1790.16,1752.36 1832.36,1752.36 v1(1990,1910)
  Bottom Layer w10: v1(1780,2370) 1820,2330 1950,2330 1980,2300 1980,1920 v1(1990,1910)
NetU2_80: U2.80 U5.1 | length 3073.6
  Top Layer w10: U5.1@249.37,2666.71 303.29,2666.71 330,2640 652.81,2640 712.81,2700 1860,2700 1910,2650 1910,2520 1820,2430 v1(1820,2370) ; v1(1740,1700) 1752.99,1712.99 U2.80@1790.16,1712.99 ; v1(1860,1830) v1(2010,1980)
  Bottom Layer w10: v1(1740,1700) 1820,1700 1860,1740 v1(1860,1830) ; v1(1820,2370) 1840,2350 1970,2350 2000,2320 2000,1990 v1(2010,1980)
VCC: C1.1 C2.1 C3.1 C4.1 C8.1 C11.1 C17.1 C19.1 C21.1 C23.1 C33.1 C42.1 J14.2 R1.1 R2.1 R3.2 R4.2 R6.2 R10.2 R14.2 R15.2 R19.2 R21.2 R23.2 R26.2 R27.2 R30.2 R112.2 R129.2 U1.2 U2.12 U2.25 U2.32 U2.48 U2.71 U3.3 U4.2 U5.9 U7.3 U8.2 U9.2 U13.5 U14.6 U14.7 | length 9771.7
  Top Layer w10: C17.1@190,2348 190,2407 229.68,2446.68 U5.9@229.69,2505.29 ; R30.2@390,2473 423,2473 462.32,2512.32 v1(462.32,2532.32) U13.5@512.6,2532.32 ; v1(1100,-120) 1140,-160 1320,-160 1350,-190 v1(1360,-190) ; U3.3@1420.31,2350 1480,2350 1492,2362 C8.1@1540,2362 ; C8.1@1540,2367 v1(1540,2430) ; v1(1550,-210) 1580,-210 1810,-440 v1(2005,-440) ; v1(1740,1900) 1749.84,1890.16 U2.71@1790.16,1890.16 ; R15.2@1800,-876 1866,-876 v1(1870,-880) ; U2.12@2079.53,1640.16 2079.53,1699.53 v1(2090,1710) ; v1(2099.21,2110.79) U2.48@2099.21,2159.84 ; v1@2230,-2410 v1(2230.94,-2409.06) ; C42.1@2287,-2600 R112.2@2383,-2600 ; U14.6@2292.4,-2389.37 2250.63,-2389.37 v1(2230.94,-2409.06) ; U2.25@2309.84,1791.73 2451.27,1791.73 C3.1@2493,1750 v1(2493,1703) ; U2.32@2309.84,1929.53 v1(2370,1930) ; R1.1@2347,890 R3.2@2473,890 2473,817 2500,790 2500,450 2547,403 C4.1@2547,345 ; v1(2410,-820) R21.2@2463,-820 ; C33.1@2447,-1470 R2.1@2543,-1470 ; R10.2@2463,-1620 2463,-1723 2537,-1797 C23.1@2537,-2160 v1(2590,-2160) ; R14.2@2463,-920 2463,-1033 2495,-1065 v1(2495,-1470) ; 2495,-1315 U9.2@2610.12,-1315 ; R6.2@2500,-180 2500,-280 2463,-317 2463,-557 2481,-575 U4.2@2610.12,-575 ; 2505,495 U1.2@2610.12,495 ; 2537,-578 C11.1@2537,-720 ; 2542,-2005 U8.2@2610.12,-2005 ; C11.1@2546.83,-728.15 C11.1@2537,-720 ; C4.1@2547,340 v2(2600,340) ; v1(2590,-720) C11.1@2537,-720 ; v1(2230.94,-2409.06) U14.7@2292.4,-2409.06 v1(2230.94,-2409.06)
  Top Layer w20: R129.2@710,1877 v1(710,2000) ; R27.2@1053,1350 R26.2@1053,1450 ; C2.1@1440,1880 v1(1500,1880) v1(1533,1913) C1.1@1590,1913
  Top Layer w25: R26.2@1053,1450 1053,1683 1100,1730 v1(1140,1730) ; v1(1070,2590) R4.2@1113,2590
  Top Layer w30: C19.1@32,2348 C17.1@190,2348
  Top Layer w40: U7.3@-580.04,2300.16 -484.84,2300.16 -420,2365 C21.1@-420,2505
  Bottom Layer w10: v1(830,-90) 1070,-90 v1(1100,-120) ; v1(1360,-190) 1530,-190 v1(1550,-210)
  Bottom Layer w40: v1(-2100,920) -2100,1380 -2140,1420 -2140,1510 -1350,2300 -1090,2300 -985,2405 v1(-420,2405)
  other v1: 2330,-2600 -2100,950 -2100,980 -2100,1010 -2100,1040 -495,2300.16 114,2346 -540,2405 -510,2405 -480,2405 -450,2405
pads on no net: D2.1 D3.2 D4.2 D5.2 D7.1 FID1.1 FID2.1 FID3.1 FID4.1 FID5.1 FID6.1 FID7.1 FID8.1 J13.5 J13.6 J14.6 M1.0 M2.0 M3.0 M4.0 M5.0 M6.0 M7.0 M8.0 M9.0 M10.0 U1.3 U1.4 U1.5 U1.6 U1.11 U1.12 U1.13 U1.14 U2.2 U2.3 U2.4 U2.5 U2.6 U2.7 U2.8 U2.10 U2.15 U2.16 U2.17 U2.21 U2.22 U2.27 U2.28 U2.29 U2.30 U2.33 U2.37 U2.38 U2.41 U2.42 U2.47 U2.54 U2.55 U2.56 U2.57 U2.59 U2.60 U2.62 U2.63 U2.64 U2.65 U2.66 U2.67 U2.68 U3.5 U4.3 U4.4 U4.5 U4.6 U4.11 U4.12 U4.13 U4.14 U5.7 U6.5 U8.3 U8.4 U8.5 U8.6 U8.11 U8.12 U8.13 U8.14 U9.3 U9.4 U9.5 U9.6 U9.11 U9.12 U9.13 U9.14 U11.5 U12.5 U12.6 U14.1 U14.2 U14.10 U14.11 U14.12 U14.13 U14.14 U14.15 U14.16 U14.17 U14.18 U14.19 U14.20 U14.21 U14.22 U14.23 U14.24 U14.27 U14.28

## Polygon pours and split planes (outlines as drawn)
NetC18_1 on Top Layer "Top Layer-NetA1_1" (solid, remove dead copper, pour order 1000): -2740,1445 -2740,2740 -2215,2740 -2215,2215 -2565,2215 -2565,1445
NetC5_1 on Top Layer "Top Layer-NetC5_1" (solid, remove dead copper, pour order 1002): -2500,575 -2500,775 -2440,835 -2440,1300 -2020,1300 -2020,1430 -1870,1430 -1870,1325 -2160,1035 -2160,720 -2305,575
GND on Top Layer "Top Layer-GND" (solid, remove dead copper, pour order 1001): -2737,1443.78 -2737,820 -2452,820 -2452,1285.76 -2017,1285.76 -2017,1969.21 -1837,1969.44 -1837,2461 -2202,2461 -2202,2204.22 -2552,2204.22 -2552,1438.84 -2737,1438.84
GND on Ground (split plane): 2729.9,2451.68 2729.9,-2591.68 2591.68,-2729.9 -179.9,-2729.9 -179.9,-2490 -180.29,-2486.08 -181.43,-2482.31 -183.29,-2478.83 -185.79,-2475.79 -188.83,-2473.29 -192.31,-2471.43 -196.08,-2470.29 -200,-2469.9 -600,-2469.9 -603.92,-2470.29 -607.69,-2471.43 -611.17,-2473.29 -614.21,-2475.79 -616.71,-2478.83 -618.57,-2482.31 -619.71,-2486.08 -620.1,-2490 -620.1,-2729.9 -2729.9,-2729.9 -2729.9,-2620.1 -2500,-2620.1 -2496.08,-2619.71 -2492.31,-2618.57 -2488.83,-2616.71 -2485.79,-2614.21 -2483.29,-2611.17 -2481.43,-2607.69 -2480.29,-2603.92 -2479.9,-2600 -2479.9,-1500 -2480.29,-1496.08 -2481.43,-1492.31 -2483.29,-1488.83 -2485.79,-1485.79 -2488.83,-1483.29 -2492.31,-1481.43 -2496.08,-1480.29 -2500,-1479.9 -2729.9,-1479.9 -2729.9,2476.68 -2476.68,2729.9 -320.1,2729.9 -320.1,2560 -319.71,2556.08 -318.57,2552.31 -316.71,2548.83 -314.21,2545.79 -311.17,2543.29 -307.69,2541.43 -303.92,2540.29 -300,2539.9 -190,2539.9 -186.08,2540.29 -182.31,2541.43 -178.83,2543.29 -175.79,2545.79 -173.29,2548.83 -171.43,2552.31 -170.29,2556.08 -169.9,2560 -169.9,2729.9 2451.68,2729.9
NetC18_1 on Power (split plane): 323 vertices, not listed, extent -2729.9,-1987.96 2002.96,2729.9
VCC on Power (split plane): 362 vertices, not listed, extent -2729.9,-2729.9 2729.9,2729.9

## Keep-outs
Keep-Out Layer:
  lines w8: -2750,-2750 -2750,2485 -2485,2750 2460,2750 2750,2460 2750,-2600 2600,-2750 -2750,-2750
  lines w12: 3975,1760 6075,1760
  text "NOTES:  UNLESS OTHERWISE SPECIFIED" at 4050,1810 h62.5
  text "1." at 3850,1585 h50
  text "MAT'L: FR-406 ROHS COMPLiANT, .062 THK." at 3990,1585 h50
  text "2." at 3850,1460 h50
  text "TOP AND BOTTOM LAYER - 1 OZ COPPER AFTER PLATING." at 3990,1460 h50
  text "3." at 3850,1335 h50
  text "POWER AND GROUND LAYER - 0.5 OZ COPPER." at 3990,1335 h50
  text "4." at 3850,1210 h50
  text "FINISH: GOLD FLASH OVER ALL EXPOSED COPPER" at 3990,1210 h50
  text "5." at 3850,1085 h50
  text "ALL HOLES ARE PLATED THRU W/ MIN .001 (1 OZ) COPPER." at 3990,1085 h50
  text "6." at 3850,960 h50
  text "ALL DIMENSIONS ARE FINISHED DIMENSIONS:" at 3990,960 h50
  text ".XXX = +/- .005  .XX = +/- .01  HOLE DIA = +/- .003." at 3990,835 h50
  text "7." at 3850,710 h50
  text "VENDOR'S UL APPROVAL MARK MUST BE ON BOARD, 94V-0." at 3990,710 h50
  text "WEEK & YEAR OF FABRICATION TO BE STAMPED ON BOARD." at 3990,585 h50
  text "8." at 3850,460 h50
  text "SOLDERMASK BOTH SIDES OF BOARD. L.P.I. OVER BARE COPPER., RED INK" at 3990,460 h50
  text "9." at 3850,335 h50
  text "SILKSCREEN BOTH SIDES W/ YELLOW EPOXY INK, OVER SOLDERMASK." at 3990,335 h50
  text "10." at 3850,210 h50
  text "LAYER STACK - TOP, GROUND, POWER, BOTTOM" at 3990,210 h50

## Other copper
Top Layer:
  region net GND: 1700,690 1700,480 2060,480 2060,690 1700,690
  region net GND: 1700,320 1700,160 2060,160 2060,320 1700,320
  region net NetQ2_5: 1690,480 1370,480 1370,780 1690,780 1690,520
  region net NetQ1_5: 1690,460 1690,160 1370,160 1370,460
  region net NetC26_2: -2070,1080 -2070,630 -1420,630 -1420,1410 -1850,1410 -1850,1290 -2070,1080
  region net GND: -2030,-20 -2030,610 -1420,610 -1420,-10 -2030,-10 -2030,-50
  region net GND: -1890,1880 -1410,1880 -1280,1750 -1190,1750 -1190,1510 -1280,1430 -1890,1440 -1890,1880
  region net NetC12_2: -1810,1950 -1810,2480 -1910,2480 -1910,2610 -1910,2730 -1420,2730 -1420,2480 -1370,2440 -1370,1950 -1810,1950
Power (plane layer: these items are gaps in the copper):
  lines w8: 1460,1800 1650,1800 1650,1500 2450,1500 2450,2300 1650,2300 1650,1900 1460,1900
  lines w20: -2748.92,1301.08 -1900,1301.08 -1675,1076.08 ; -2235,2750 -2235,2520 -634.63,2520 -634.65,2100 -474.65,1940 ; -1670.32,1073.1 ccw(c15,0) -471.94,1937.71
  text "NEGATIVE IMAGE - POWER PLANE" at -925,3116 h250
Ground (plane layer: these items are gaps in the copper):
  lines w8: 1460,1900 1650,1900 1650,1500 2450,1500 2450,2300 1650,2300 1650,2000 1460,2000
  text "NEGATIVE IMAGE - GROUND PLANE" at -921,2919 h250

## Silkscreen, mask and mechanical layers (free items; w line width, h text height)
Top Overlay:
  text "GND" at -80,940 h60
  text "1" at -10,790 h60
  text "BTN NEG" at 640,680 h50
  text "V IN" at -1000,420 h60
  text "2" at -720,370 h60
  text "BTN POS" at 940,137.54 h50
  text "SPK-" at 780,-170 h60
  text "3" at -725,-395 h60
  text "CNH" at -970,-490 h60
  text "SPK+" at 780,-490 h60
  text "4" at -15,-835 h60
  text "CNL" at -70,-1010 h60
  text "MASTER - SLAVE NODE" at -932,-1936 h80
  text "PCB0008" at -932,-2046 h80
  text "V10.29.2010" at -932,-2158 h80
Bottom Overlay:
  text "1" at 2560,2580 h60 r180
  text "CLK" at 1640,2380 h60 r90
  text "GND" at 2030,2380 h60 r90
  text "VCC" at 2230,2380 h60 r90
  text "MCLR" at 2430,2380 h60 r90
  text "DAT" at 1830,2350 h60 r90
  text "PCB0010" at -1923,1462 h80
  text "V10.29.2010" at -1753,1343 h80
Board Outline:
  the board outline again, w8
Cutouts:
  circle w10: c0,0 r720.62
  pour cut-out: -720.62,0 ccw(c0,0) 0,-720.62 ccw(c0,0) 720.62,0 ccw(c0,0) 0,720.62 ccw(c0,0)
  lines w5.91: -2750,-2600 -2500,-2600 -2500,-1500 -2750,-1500 ; 1890,-2130 1400,-2130 1400,-1600 1890,-1600 ; -2400,-2600 -2100,-2600 -2100,-1500 -2400,-1500 -2400,-2600 ; -2050,-1240 -2050,-980 -1370,-1660 -1370,-1920 -2050,-1240 ; -2000,-2600 -1800,-2600 -1800,-2100 -2000,-1900 -2000,-2600 ; -2000,-1740 -1140,-2600 -800,-2600 -2000,-1400 -2000,-1740 ; -1700,-2600 -1300,-2600 -1700,-2200 -1700,-2600 ; -900,-2400 -900,-2200 130,-2200 130,-2400 -900,-2400 ; 280,-860 280,-730 410,-730 545,-595 610,-660 610,-780 530,-860 280,-860 ; 780,-60 930,-60 930,160 780,160 780,-60
  lines w7.99: 1890,-2130 1890,-1600
  lines w8: -600,-2750 -600,-2490 -200,-2490 -200,-2750 ; -300,2750 -300,2560 -190,2560 -190,2750 ; -705,680 -450,935 -275,935 -275,805 -400,680 -705,680 ; -550,-830 -550,-600 -505,-600 -350,-755 -270,-755 -270,-950 -430,-950 -550,-830 ; -380,2290 -290,2290 -290,2450 -380,2450 -380,2290 ; 270,835 435,670 640,670 380,930 270,930 270,835

## Dimensions
2600,-2750 to 1156.3,2002.7 on Dimensions
2600,-2750 to 2548.99,1188.61 on Dimensions
2600,-2750 to 2312.5,0 on Dimensions
2600,-2750 to 1156.2,-2002.7 on Dimensions
2600,-2750 to 1188.61,-2548.99 on Dimensions
-2750,-2750 to -1188.61,2548.99 on Dimensions
-2750,-2750 to -1156.3,2002.7 on Dimensions
-2750,-2750 to -2312.5,0 on Dimensions
-2750,-2750 to -2548.99,-1188.61 on Dimensions
-2750,-2750 to -1156.2,-2002.7 on Dimensions
-2750,2485 to 2548.99,1188.61 on Dimensions
-2750,2485 to 1156.3,2002.7 on Dimensions
-2750,2485 to -1156.3,2002.7 on Dimensions
-2750,2485 to -1188.61,2548.99 on Dimensions
-2750,2485 to -2312.5,0 on Dimensions
-2750,-2750 to 2312.5,0 on Dimensions
-2750,-2750 to 1188.61,-2548.99 on Dimensions
-2750,-2750 to 1156.2,-2002.7 on Dimensions
-2750,-2750 to -1156.2,-2002.7 on Dimensions
-2750,-2750 to -2548.99,-1188.61 on Dimensions
-2750,-2750 to 2750,-2600 on Dimensions
-2750,-2750 to -2750,2750 on Dimensions